# EAGLE board Blueboard_Pro_v1.1 (EAGLE 6.3)
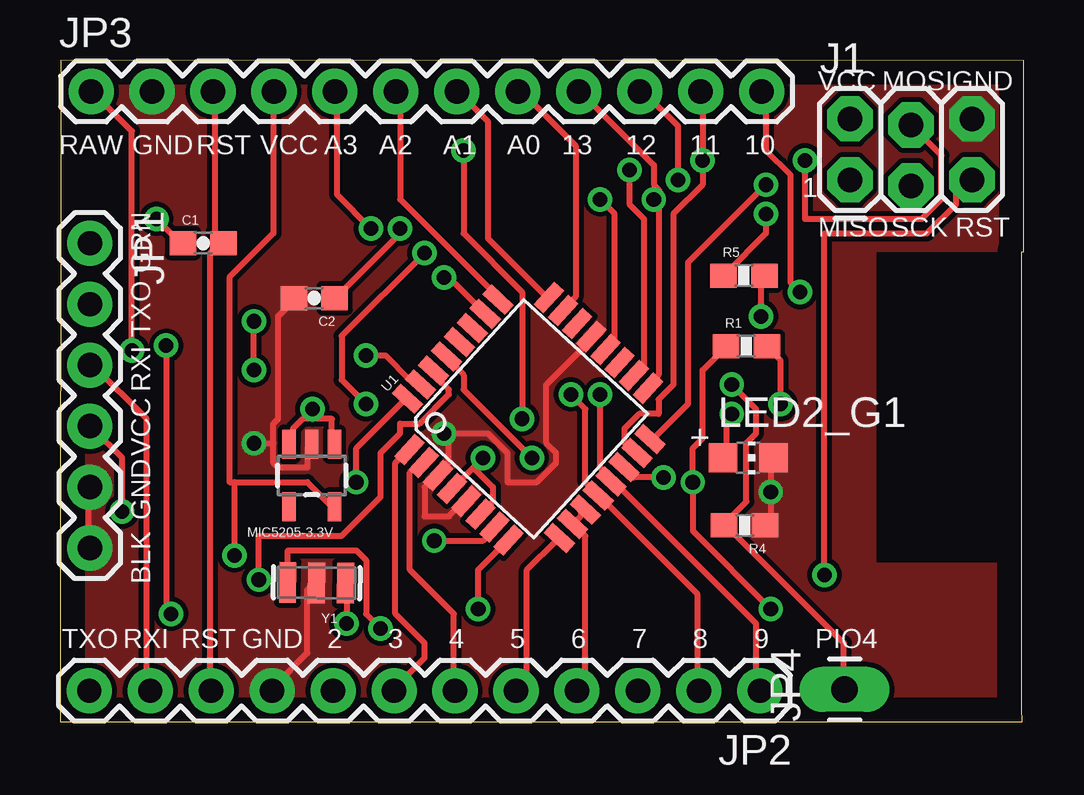
[diagram p0: board, top side]
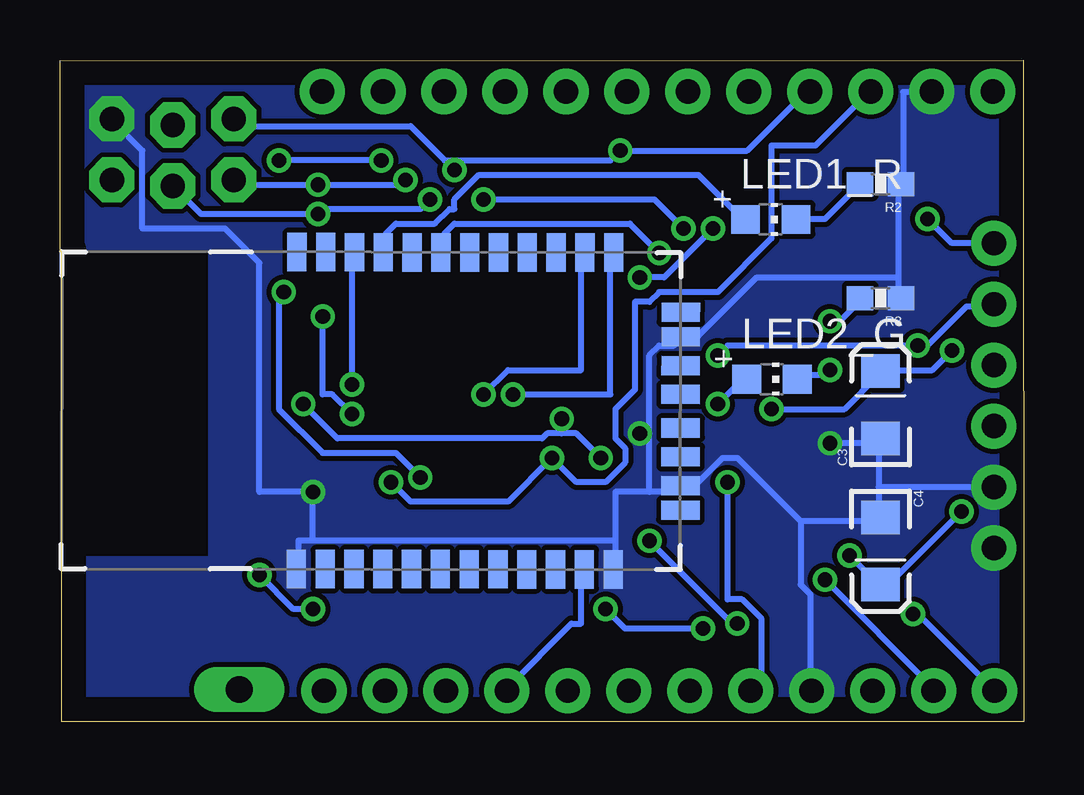
[diagram p1: board, bottom side, seen from below]

Size 40.16 x 27.57 mm. Coordinates in mm from the lower left corner, seen from the top.
Outline: 0,0 40.09,0 40.08,0.53 40.08,19.58 40.16,19.58 40.16,27.55 0.03,27.57 0,0
Copper layers (1*16): Top 0.035mm / dielectric 1.5mm / Bottom 0.035mm
Design rules "default": minimum track width 10mil, minimum drill 24mil, track to track 8mil, track to pad 8mil, pad to pad 8mil, via to via 8mil, smd to smd 8mil, copper to edge 40mil, drill to drill 8mil, minimum pad ring 10mil, minimum via ring 8mil, stop-mask expansion 4mil, vias tented up to drill 0mil, thermal gap 10mil

## Footprints (pad centres in the part's own frame; a part is rotated, then mirrored left to right if it is on the bottom)
0603-CAP = smd 1.1 x 1: 1 -0.85,0; 2 0.85,0
EIA3216 = smd 1.4 x 1.6: A 1.4,0; C -1.4,0
2X3_LOCK = drill 1.016 pad 1.88 octagon: 1 0,0; 2 0,2.54; 3 2.54,-0.254; 4 2.54,2.286; 5 5.08,0; 6 5.08,2.54
1X06 = drill 1.016 pad 1.88: 1 0,0; 2 2.54,0; 3 5.08,0; 4 7.62,0; 5 10.16,0; 6 12.7,0
1X12 = drill 1.016 pad 1.88: 1 0,0; 2 2.54,0; 3 5.08,0; 4 7.62,0; 5 10.16,0; 6 12.7,0; 7 15.24,0; 8 17.78,0; 9 20.32,0; 10 22.86,0; 11 25.4,0; 12 27.94,0
1X01_LONGPAD = drill 1.118 pad 1.88 long: 1 0,0
CHIP-LED0805 = smd 1.2 x 1.2: A 0,-1.05; C 0,1.05
SOT23-5 = smd 0.55 x 1.2: 1 -0.95,-1.3; 2 0,-1.3; 3 0.95,-1.3; 4 0.95,1.3; 5 -0.95,1.3
0603-RES = smd 1.1 x 1: 1 -0.85,0; 2 0.85,0
TQFP32-08 = smd 1.27 x 0.559: 1 -4.293,2.8; 2 -4.293,2; 3 -4.293,1.2; 4 -4.293,0.4; 5 -4.293,-0.4; 6 -4.293,-1.2; 7 -4.293,-2; 8 -4.293,-2.8; 17 4.293,-2.8; 18 4.293,-2; 19 4.293,-1.2; 20 4.293,-0.4; 21 4.293,0.4; 22 4.293,1.2; 23 4.293,2; 24 4.293,2.8 | smd 0.559 x 1.27: 9 -2.8,-4.293; 10 -2,-4.293; 11 -1.2,-4.293; 12 -0.4,-4.293; 13 0.4,-4.293; 14 1.2,-4.293; 15 2,-4.293; 16 2.8,-4.293; 25 2.8,4.293; 26 2,4.293; 27 1.2,4.293; 28 0.4,4.293; 29 -0.4,4.293; 30 -1.2,4.293; 31 -2,4.293; 32 -2.8,4.293
RN41 = smd 0.8 x 1.6: 1 -6.6,-6.6; 2 -5.4,-6.6; 3 -4.2,-6.6; 4 -3,-6.6; 5 -1.8,-6.6; 6 -0.6,-6.6; 7 0.6,-6.6; 8 1.8,-6.6; 9 3,-6.6; 10 4.2,-6.6; 11 5.4,-6.6; 12 6.6,-6.6; 13 6.6,6.6; 14 5.4,6.6; 15 4.2,6.6; 16 3,6.6; 17 1.8,6.6; 18 0.6,6.6; 19 -0.6,6.6; 20 -1.8,6.6; 21 -3,6.6; 22 -4.2,6.6; 23 -5.4,6.6; 24 -6.6,6.6 | smd 1.6 x 0.8: 28 9.4,3.1; 29 9.4,-3.1; 30 9.4,4.122; 31 9.4,1.9; 32 9.4,0.7; 33 9.4,-0.7; 34 9.4,-1.9; 35 9.4,-4.122
RESONATOR-SMD = smd 0.7 x 1.7: 1 -1.2,0; 2 0,0; 3 1.2,0

## Placement (x,y rotation side)
C1  0.1uF  [0603-CAP]  5.97,19.94 0 top
C2  0.1uF  [0603-CAP]  10.59,17.65 180 top
C3  10uF  [EIA3216]  5.97,13.21 90 bottom
C4  10uF  [EIA3216]  5.97,7.11 270 bottom
J1  AVR_SPI_PRG_62X3_LOCK  [2X3_LOCK]  32.92,22.58 0 top
JP1  FTDI_Basic  [1X06]  1.24,19.94 270 top
JP2  M12PTH  [1X12]  29.16,1.3 180 top
JP3  M12PTH  [1X12]  1.3,26.26 0 top
JP4  M01PTH_LONGPAD  [1X01_LONGPAD]  32.69,1.35 90 top
LED1_R  [CHIP-LED0805]  10.54,20.93 270 bottom
LED2_G  [CHIP-LED0805]  10.49,14.27 270 bottom
LED2_G1  [CHIP-LED0805]  28.68,11 270 top
MIC5205-3.3V  V_REG_LDOSMD  [SOT23-5]  10.49,10.26 180 top
R1  1k  [0603-RES]  28.6,15.65 0 top
R2  330  [0603-RES]  5.97,22.4 180 bottom
R3  330  [0603-RES]  5.97,17.65 180 bottom
R4  10k  [0603-RES]  28.52,8.18 180 top
R5  330  [0603-RES]  28.5,18.59 0 top
U1  ATMEGA168  [TQFP32-08]  19.53,12.62 47.5 top
U2  BLUETOOTH-RN41"  [RN41]  23.7,12.96 359.9 bottom
Y1  8MHZ  [RESONATOR-SMD]  10.69,5.79 179.3 top

## Library data of the parts
C1 R2 R3 R5 = SparkFun-Passives
C2 = SparkFun-Capacitors
C3 C4 = SparkFun-Capacitors; PROD_ID: CAP-00811
J1 JP1-JP4 = SparkFun-Connectors
LED1_R LED2_G LED2_G1 = adafruit
MIC5205-3.3V = SparkFun-PowerIC
R1 = SparkFun-Resistors; PROD_ID: RES-07856
R4 = SparkFun-Resistors
U1 = SparkFun-DigitalIC
U2 = SparkFun-RF
Y1 = SparkFun-FreqCtrl; PROD_ID: XTAL-08895

## Nets
A0: JP3.8 U1.23
A1: JP3.7 U1.24
A2: JP3.6 U1.25
A3: JP3.5 U1.26
A4: U1.27
A5: U1.28
A6: U1.19
A7: U1.22
D2: JP2.8 U1.32
D3: JP2.7 U1.1
D4: JP2.6 U1.2
D5: JP2.5 U1.9
D6: JP2.4 U1.10 U1.11 U2.11
D8: JP2.2 U1.12 U2.13
D9: JP2.1 U1.13 U2.14
D10: JP3.12 U1.14
DTR: C1.1 JP1.1
GND: C2.2 C3.C C4.C J1.6 JP1.5 JP1.6 JP2.9 JP3.2 LED2_G1.C MIC5205-3.3V.2 R2.1 R3.1 R4.1 U1.3 U1.5 U1.21 U2.1 U2.12 U2.28 U2.29 Y1.2
MISO: J1.1 JP3.10 U1.16
MOSI: J1.4 JP3.11 U1.15
N$1: LED2_G1.A R5.2
N$8: U1.7 Y1.1
N$9: U1.8 Y1.3
N$26: C2.1 U1.20
N$38: LED1_R.A U2.21
N$39: LED1_R.C R2.2
N$40: LED2_G.C R3.2
N$41: LED2_G.A U2.19
PIO4: JP4.1 R4.2 U2.22
RAW: C3.A JP3.1 MIC5205-3.3V.1 MIC5205-3.3V.3
RESET: C1.2 J1.5 JP2.10 JP3.3 R1.1 U1.29
RXI: JP1.3 JP2.11 U1.30
SCK: J1.3 JP3.9 R5.1 U1.17
TXO: JP1.2 JP2.12 U1.31
VCC: C4.A J1.2 JP1.4 JP3.4 MIC5205-3.3V.5 R1.2 U1.4 U1.6 U1.18

## Tracks (layer width: path | path; a pad name or v marks a point on that pad's centre or on a via)
A0
  Top 0.254: U1.23 21.08,17.3 21.49,17.7 21.49,24 19.25,26.24 JP3.8
A1
  Top 0.254: U1.24 20.27,17.7 17.83,20.14 17.83,25.02 16.61,26.24 JP3.7
A2
  Top 0.254: U1.25 18.24,17.7 14.17,21.77 14.17,26.24 JP3.6
A3  (via drill 0.61)
  Top 0.254: v16,18.52 16.21,18.52 17.63,17.09 U1.26 | v12.95,20.55 11.53,21.97 11.53,26.24 JP3.5
  Bottom 0.254: v16,18.52 14.99,18.52 v12.95,20.55
D2  (via drill 0.61)
  Top 0.254: v12.34,9.98 12.34,11.4 14.38,13.44 U1.32
  Bottom 0.254: v12.34,9.98 12.34,5.11 11.74,5.11 10.92,4.29 10.92,1.45 11.33,1.45 JP2.8
D3
  Top 0.254: U1.1 14.38,11.2 13.97,10.8 13.97,4.5 15.19,3.28 15.19,2.67 13.97,1.45 JP2.7
D4
  Top 0.254: U1.2 14.99,10.8 14.58,10.39 14.58,6.32 16.41,4.5 16.41,1.45 JP2.6
D5
  Top 0.254: U1.9 20.68,7.54 19.46,6.32 19.46,1.85 19.05,1.45 JP2.5
D6
  Top 0.254: U1.11 21.69,8.76 21.69,8.56 21.49,8.36 U1.10 21.49,8.15 21.9,7.75 21.9,1.65 JP2.4
  Bottom 0.254: U2.11 18.44,6.32 18.44,4.09 18.85,4.09 21.49,1.45 JP2.4
D8  (via drill 0.61)
  Top 0.254: JP2.2 26.57,1.45 26.57,5.31 22.5,9.37 U1.12 22.3,9.58 21.9,9.98 21.9,13.03 v21.29,13.64
  Bottom 0.254: v21.29,13.64 17.22,13.64 17.22,19.53 U2.13
D9  (via drill 0.61)
  Top 0.254: JP2.1 29.01,1.45 29.01,4.09 23.11,9.98 U1.13 22.91,10.19 22.5,10.59 v22.5,13.64
  Bottom 0.254: v22.5,13.64 21.49,14.66 18.44,14.66 18.44,19.53 U2.14
D10  (via drill 0.61)
  Top 0.254: v25.15,10.19 23.93,10.19 23.52,10.59 U1.14 | v30.84,17.91 30.43,18.31 30.43,22.78 29.41,23.8 29.41,26.24 JP3.12
  Bottom 0.254: v25.15,10.19 26.16,11.2 29.21,11.2 31.04,13.03 31.04,17.91 v30.84,17.91
DTR  (via drill 0.61)
  Top 0.254: v4.01,20.96 5.03,19.94 C1.1
  Bottom 0.254: v4.01,20.96 3,19.94 JP1.1
GND  (via drill 0.61)
  Top 0.254: Y1.2 10.52,5.72 10.31,5.51 10.31,2.87 8.89,1.45 JP2.9 | 8.89,11.61 8.89,10.8 9.09,10.59 10.31,10.59 10.31,11.4 MIC5205-3.3V.2 | 8.89,11.61 8.89,12.42 9.09,12.62 9.09,16.89 9.7,17.5 C2.2 | v8.08,11.61 8.89,11.61 | JP1.6 1.17,7.34 1.17,9.78 JP1.5 | U1.5 16.82,9.17 16.21,8.56 15.19,8.56 15.19,9.78 15.6,10.19 U1.3 15.8,10.39 16.21,10.8 16.21,12.01 | 16.21,12.01 17.83,12.01 18.64,11.2 18.64,9.98 19.86,9.98 20.68,10.8 20.68,11.2 20.27,11.61 20.27,14.05 22.1,15.88 U1.21 | R4.1 29.41,8.36 29.62,8.56 v29.62,9.58 29.62,11 LED2_G1.C | v16,12.01 16.21,12.01
  Bottom 0.254: 6.05,11.61 6.05,9.78 | 6.05,9.78 6.05,8.56 C4.C 6.05,8.36 9.3,8.36 | JP1.5 6.05,9.78 | 6.05,11.61 v8.08,11.61 | 6.05,11.61 C3.C | 9.3,8.36 9.3,5.72 8.89,5.31 8.89,1.45 JP2.9 | 5.23,18.52 5.23,22.38 R2.1 5.03,22.58 5.03,26.24 4.01,26.24 JP3.2 | 5.23,18.52 5.23,17.7 R3.1 | 17.02,7.54 17.02,9.58 15.6,9.58 | 17.02,7.54 17.02,6.53 U2.12 | 15.6,9.58 14.58,9.58 14.38,9.78 U2.29 14.17,9.98 13.56,9.98 12.55,11 11.94,11 9.3,8.36 | 17.02,7.54 29.62,7.54 | 29.62,7.54 30.23,7.54 30.23,6.53 U2.1 | 15.6,9.58 15.6,12.01 | 15.6,12.01 15.6,15.27 15.19,15.67 14.58,15.67 14.38,15.88 U2.28 14.17,16.08 13.56,16.08 11.13,18.52 5.23,18.52 | 29.62,7.54 v29.62,9.58 31.85,9.58 31.85,19.13 33.27,20.55 36.73,20.55 36.73,23.8 37.95,25.02 J1.6 | 15.6,12.01 v16,12.01
  pour Top (isolate 0, no thermals): -0.05,27.46 40.08,27.46 40.08,19.84 40.34,19.58 33.99,19.58 33.99,6.63 40.08,6.63 40.08,0.03 -0.05,0.03
  pour Bottom (isolate 0, no thermals): -0.05,27.46 40.08,27.46 40.08,19.58 33.99,19.58 33.99,6.88 40.08,6.88 40.08,0.03 -0.05,0.03
MISO  (via drill 0.61)
  Top 0.254: v29.41,22.38 26.16,19.13 26.16,13.23 24.74,11.81 U1.16 | v25.76,22.58 25.76,24.82 24.33,26.24 JP3.10
  Bottom 0.254: J1.1 32.87,22.58 32.66,22.38 v29.41,22.38 25.96,22.38 v25.76,22.58
MOSI  (via drill 0.61)
  Top 0.254: U1.15 23.93,11.2 23.52,11.61 23.52,12.22 24.13,12.83 24.94,12.83 24.94,13.44 25.55,14.05 25.55,21.16 26.77,22.38 v26.77,23.39 26.77,26.24 JP3.11 | J1.4 36.73,23.6 36.73,21.77 35.92,20.96 31.04,20.96 v31.04,23.39
  Bottom 0.254: v26.77,23.39 v31.04,23.39
N$1  (via drill 0.61)
  Top 0.254: v29.21,16.89 29.21,18.52 R5.2 | v27.99,12.83 27.79,12.62 27.79,11 LED2_G1.A
  Bottom 0.254: v29.21,16.89 29.21,13.64 28.8,13.64 v27.99,12.83
N$8  (via drill 0.61)
  Top 0.254: v15.6,7.54 17.63,7.54 18.03,7.95 U1.7 | v11.94,4.09 11.94,5.72 Y1.1
  Bottom 0.254: v15.6,7.54 12.14,4.09 v11.94,4.09
N$9  (via drill 0.61)
  Top 0.254: v17.42,4.7 17.42,6.32 18.64,7.54 U1.8 | v13.36,3.89 12.75,4.5 12.75,6.73 12.34,7.14 9.5,7.14 9.5,5.92 Y1.3
  Bottom 0.254: v17.42,4.7 16.61,3.89 v13.36,3.89
N$26  (via drill 0.61)
  Top 0.254: v14.17,20.55 14.17,20.35 11.53,17.7 C2.1 | v22.5,21.77 23.11,21.16 23.11,15.88 22.91,15.67 U1.20
  Bottom 0.254: v14.17,20.55 15.39,21.77 v22.5,21.77
N$38
  Bottom 0.254: LED1_R.A 11.74,20.96 13.56,22.78 22.71,22.78 23.72,21.77 23.72,21.36 23.93,21.36 24.54,20.75 26.16,20.75 26.57,20.35 26.57,19.74 U2.21
N$39
  Bottom 0.254: R2.2 6.86,22.38 8.28,20.96 9.3,20.96 LED1_R.C
N$40  (via drill 0.61)
  Top 0.254: v8.08,14.66 v8.08,16.69
  Bottom 0.254: v8.08,16.69 7.67,16.69 6.86,17.5 R3.2 | v8.08,14.66 8.28,14.45 9.3,14.45 LED2_G.C
N$41  (via drill 0.61)
  Top 0.254: v12.75,13.23 11.74,14.25 11.74,16.08 v15.19,19.53
  Bottom 0.254: v12.75,13.23 11.74,14.25 LED2_G.A | v15.19,19.53 16.41,20.75 23.72,20.75 24.13,20.35 24.13,19.74 U2.19
PIO4  (via drill 0.61)
  Top 0.254: JP4.1 32.66,1.45 32.66,3.28 27.79,8.15 R4.2 27.79,8.36 28.6,9.17 28.6,11.61 29.01,12.01 29.01,13.03 v27.99,14.05
  Bottom 0.254: v27.99,14.05 27.99,19.53 U2.22
RAW  (via drill 0.61)
  Top 0.254: 10.52,12.62 11.33,12.62 11.33,11.61 MIC5205-3.3V.1 | 10.52,12.62 10.11,12.62 9.7,12.22 9.7,11.61 MIC5205-3.3V.3 | 10.52,12.62 v10.52,13.03 | v3,15.47 3,24.61 1.37,26.24 JP3.1
  Bottom 0.254: v10.52,13.03 7.47,13.03 6.05,14.45 C3.A 5.84,14.66 3.81,14.66 v3,15.47
RESET  (via drill 0.61)
  Top 0.254: v19.66,11 16.82,13.84 16.82,14.45 16.21,15.06 U1.29 | R1.1 27.58,15.47 26.77,14.66 26.77,11.81 26.37,11.4 v26.37,9.98 26.37,7.95 v29.62,4.7 | 6.66,19.94 6.45,20.14 6.45,26.24 JP3.3 | 6.66,19.94 6.25,19.53 6.25,1.45 JP2.10 | 6.66,19.94 C1.2 | v31.85,6.12 31.85,20.35 36.12,20.35 37.34,21.56 37.34,21.97 37.95,22.58 J1.5
  Bottom 0.254: v26.37,9.98 25.55,9.17 21.49,9.17 v19.66,11 18.64,9.98 17.42,9.98 16.61,10.8 16.61,11.4 17.02,11.81 17.02,13.03 16.21,13.84 16.21,17.5 15.6,17.5 15.19,17.91 12.75,17.91 10.52,20.14 10.52,24 8.69,24 6.45,26.24 JP3.3 | v31.85,6.12 30.43,4.7 v29.62,4.7
RXI  (via drill 0.61)
  Top 0.254: v8.28,5.92 8.28,7.75 11.74,7.75 13.36,9.37 13.36,11.2 14.17,12.01 14.17,12.42 14.99,12.42 16.21,13.64 16.21,13.84 15.6,14.45 U1.30 | JP1.3 1.37,14.86 3.61,12.62 3.61,1.45 JP2.11
  Bottom 0.254: v8.28,5.92 3.81,1.45 JP2.11
SCK  (via drill 0.61)
  Top 0.254: v29.41,21.16 29.41,20.35 27.79,18.72 R5.1 | 24.94,21.77 24.94,22.17 24.74,22.38 24.74,23.19 21.69,26.24 JP3.9 | 24.94,21.77 24.94,14.45 24.54,14.05 U1.17 | 24.94,21.77 v24.74,21.77
  Bottom 0.254: J1.3 34.29,21.16 v29.41,21.16 29.21,21.36 25.15,21.36 v24.74,21.77
TXO  (via drill 0.61)
  Top 0.254: v12.75,15.27 13.56,15.27 14.58,14.25 14.99,14.25 U1.31 | v4.62,4.5 4.42,4.7 v4.42,15.67
  Bottom 0.254: v12.75,15.27 12.34,15.67 v4.42,15.67 4.01,15.67 2.39,17.3 1.37,17.3 JP1.2 | JP2.12 4.42,4.5 v4.62,4.5
VCC  (via drill 0.61)
  Top 0.254: 7.26,9.98 7.06,9.98 7.06,18.52 8.89,20.35 8.89,26.24 JP3.4 | 7.26,9.98 10.31,9.98 11.33,8.97 MIC5205-3.3V.5 | 7.26,9.98 v7.26,6.93 | v2.59,8.76 2.59,11 1.37,12.22 JP1.4 | v30.02,13.23 30.02,15.06 29.62,15.47 R1.2 | 17.22,10.59 16.41,9.78 U1.4 | 17.22,10.59 v17.63,11 | 17.22,10.59 18.03,9.78 18.03,9.17 17.63,8.76 U1.6 | v23.72,22.99 23.72,21.56 24.33,20.96 24.33,14.86 23.93,14.45 U1.18 | v19.25,12.62 19.25,17.91 16.82,20.35 v16.82,23.8
  Bottom 0.254: v7.26,6.93 6.05,5.72 C4.A 5.84,5.72 5.64,5.72 v2.59,8.76 | v30.02,13.23 28.6,11.81 20.07,11.81 19.86,12.01 19.25,12.01 | 19.25,12.01 18.64,12.01 v17.63,11 | 24.13,23.39 25.55,24.82 32.66,24.82 32.87,25.02 J1.2 | 24.13,23.39 v23.72,22.99 | v19.25,12.62 19.25,12.01 | 24.13,23.39 17.22,23.39 v16.82,23.8 11.53,23.8 9.09,26.24 JP3.4

## Text on the board
tPlace: VCC | MOSI | GND | RAW | GND | RST | VCC | A3 | A2 | A1 | A0 | 13 | 12 | 11 | 10 | 1 | MISO | SCK | RST | GRN | TXO | RXI | VCC | GND | BLK | TXO | RXI | RST | GND | 2 | 3 | 4 | 5 | 6 | 7 | 8 | 9 | PIO4